# Altium PCB OBC Subsystem_AVR.PcbDoc
Units mil, origin at the board's own origin, x right, y up, seen from the top; angles counter-clockwise.
Board outline 3757.87 x 3555.12 mil, 4 copper layers (Top Layer, Ground, Power, Bottom Layer), stack 64.6 mil thick; 94 components, 88 nets, 413 pads, 0 vias.
Unrouted connection lines stored in the file: 208.
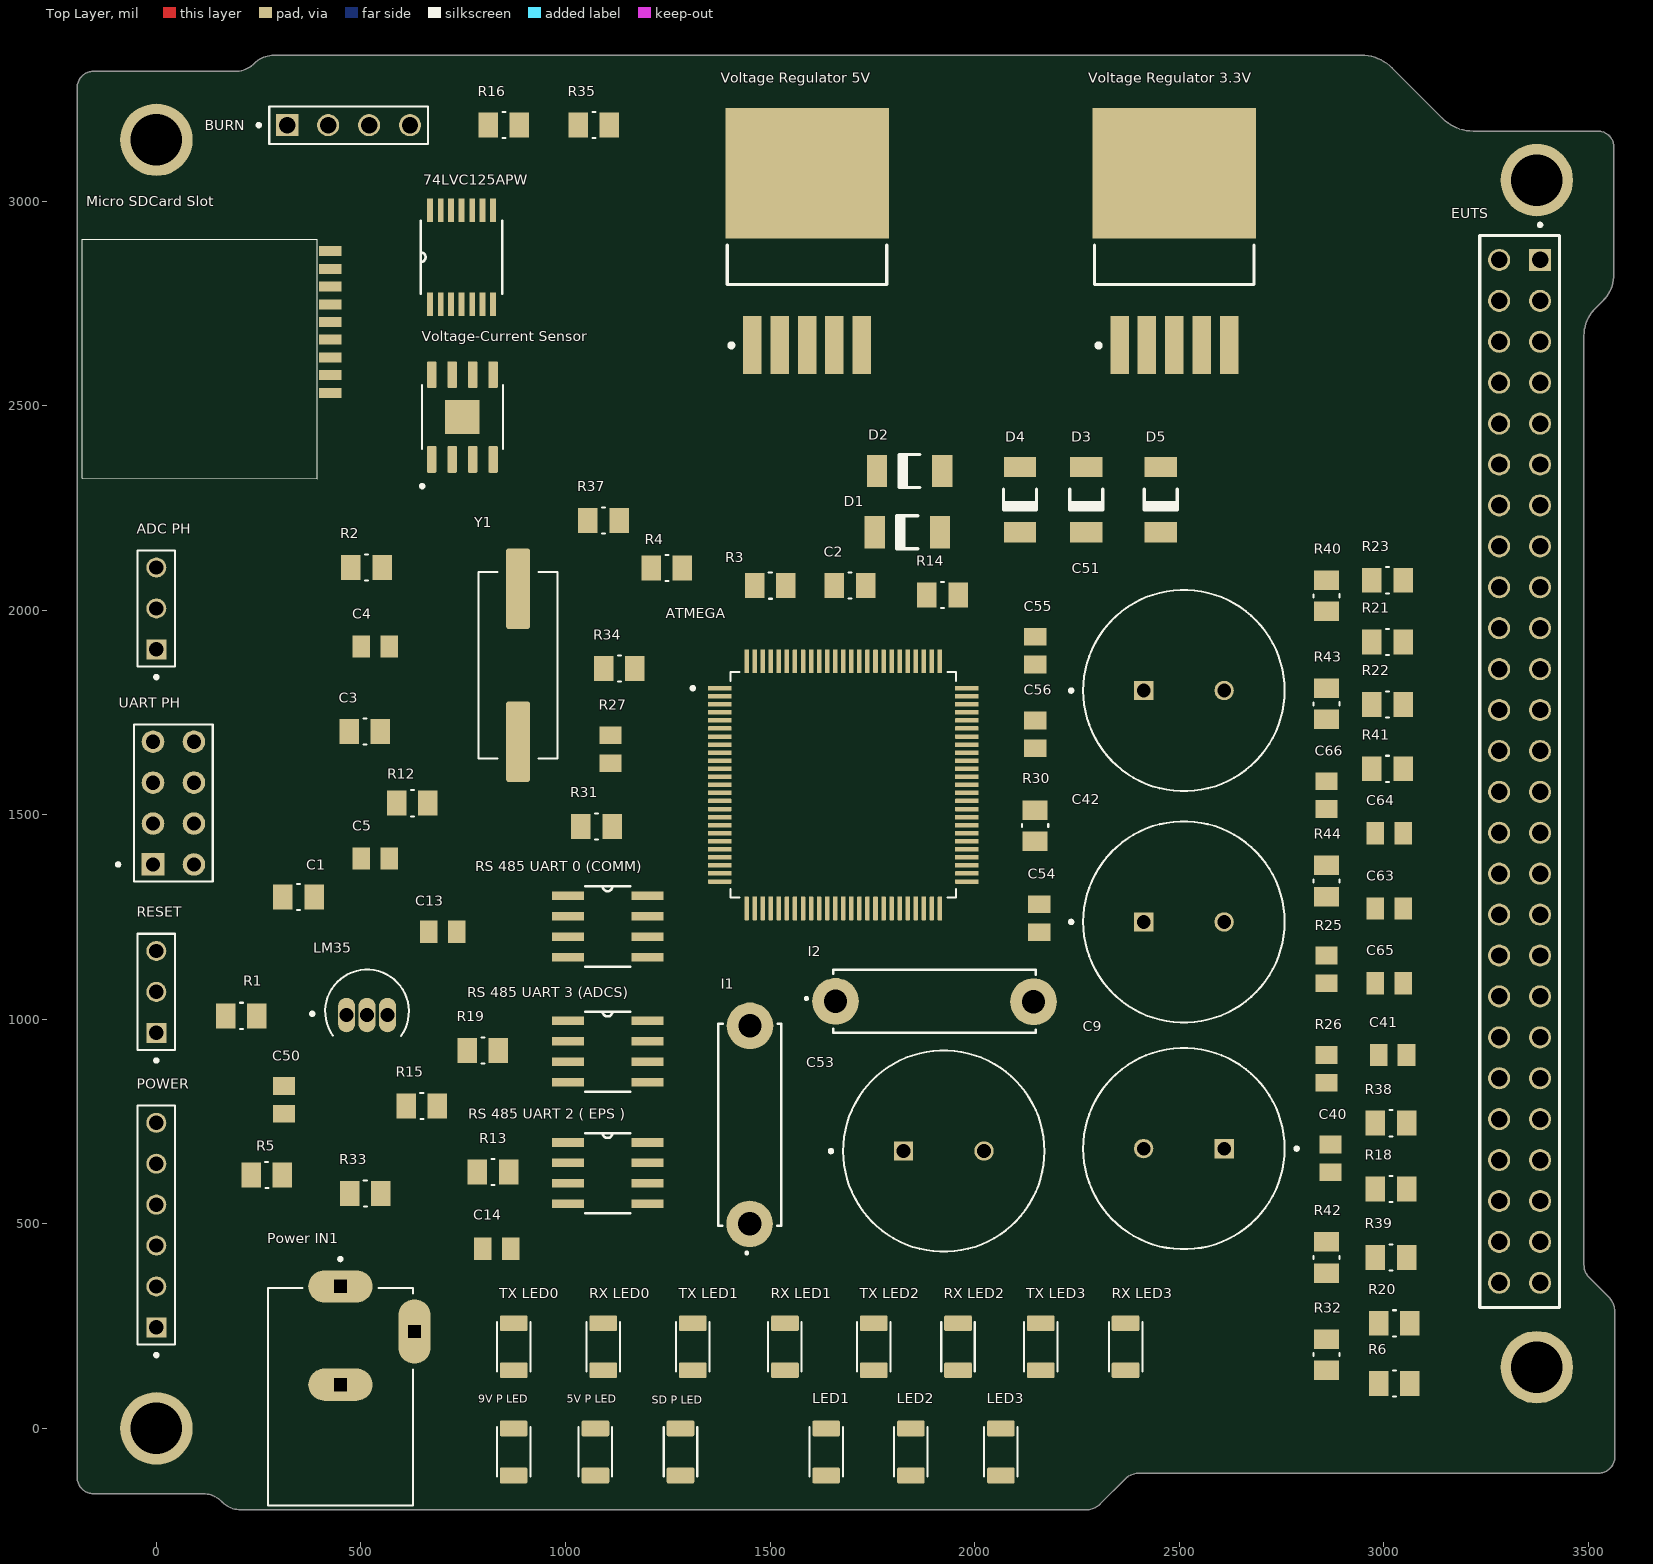
[diagram p0: Top Layer view]
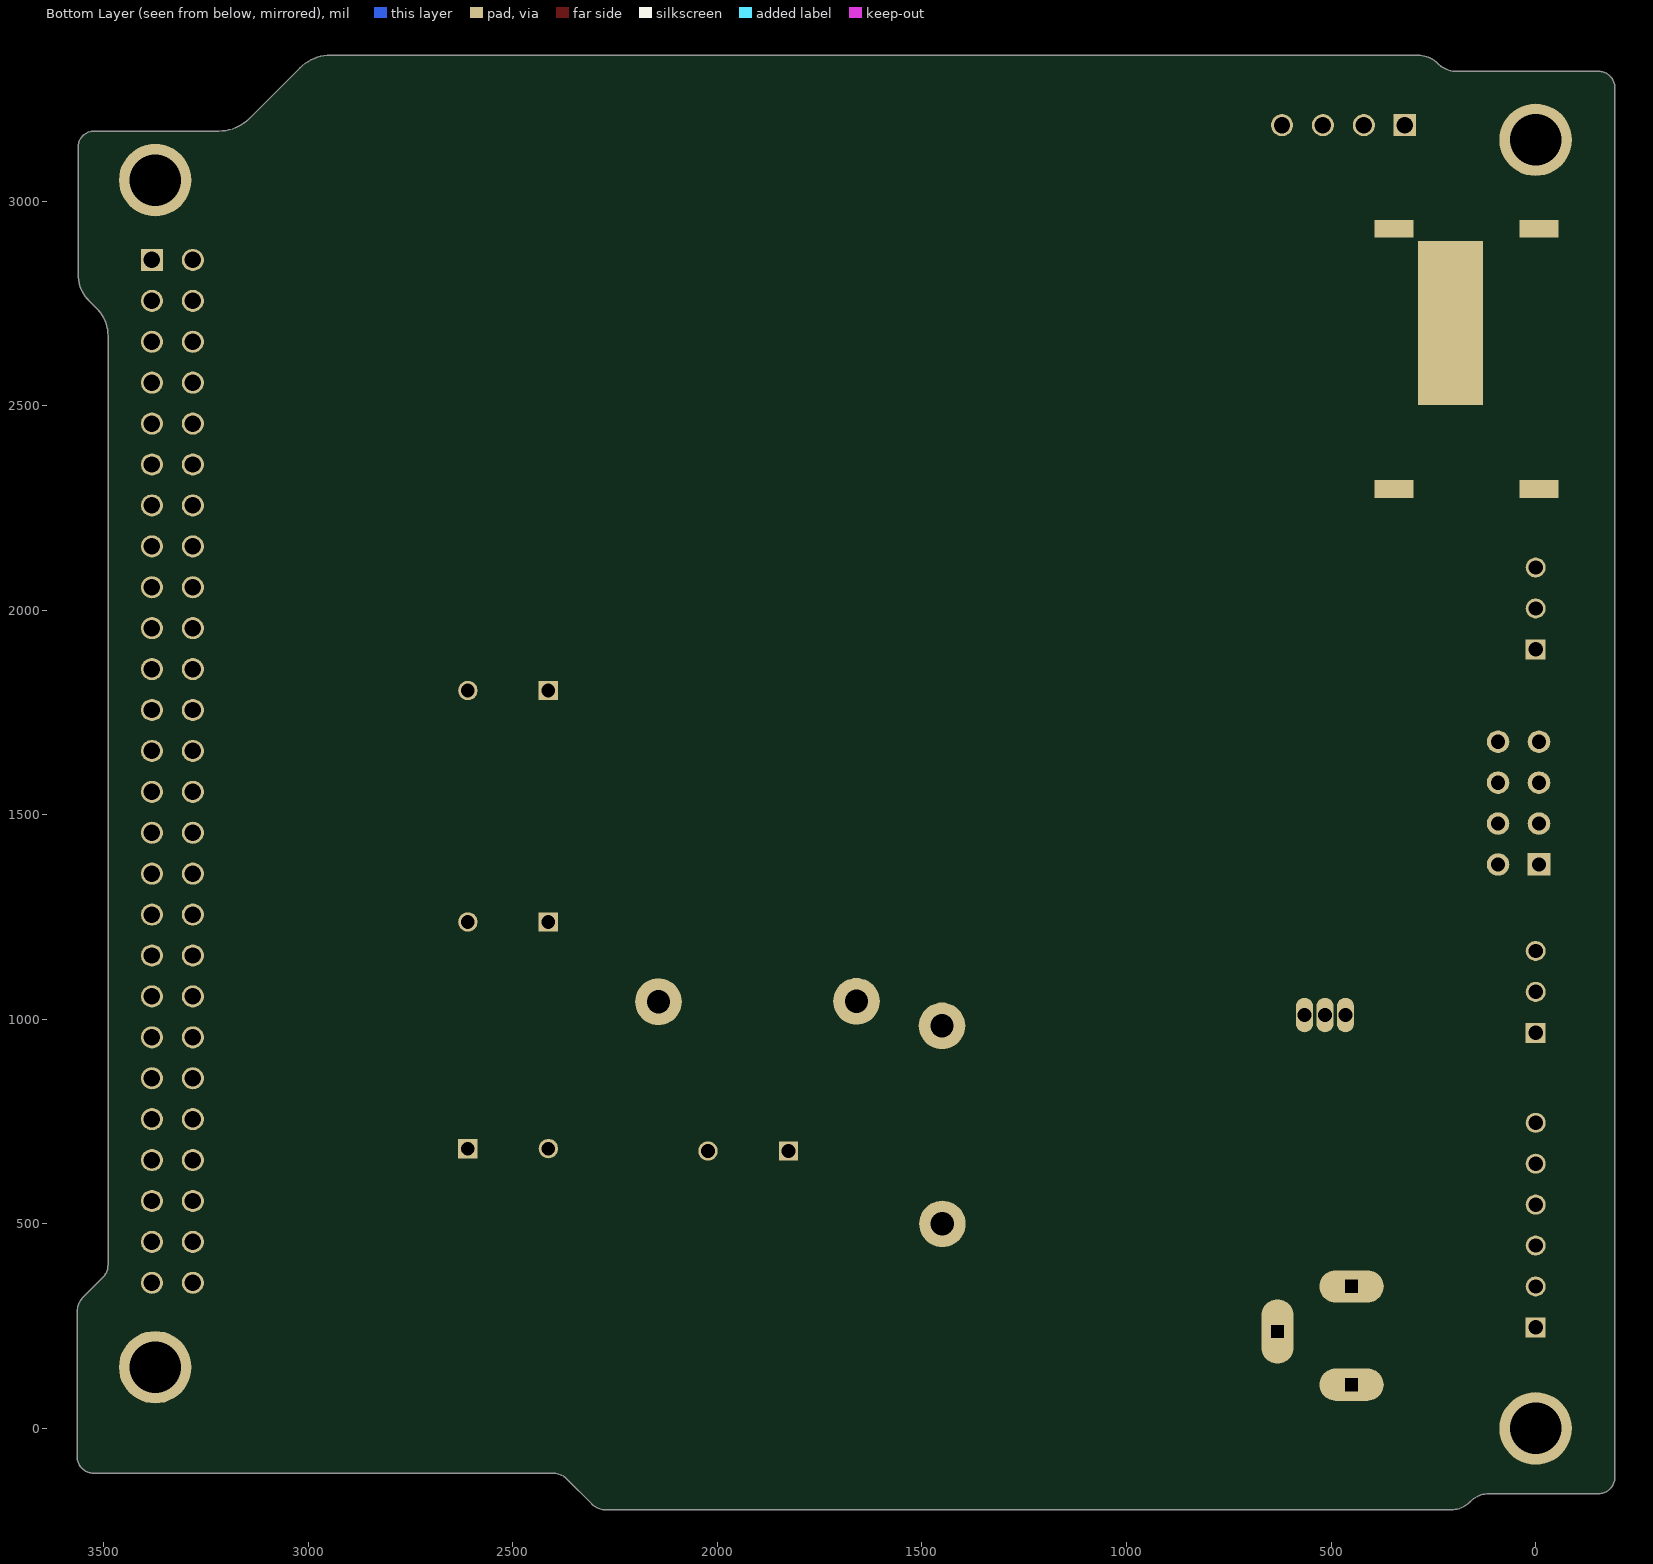
[diagram p1: Bottom Layer view, seen from below]
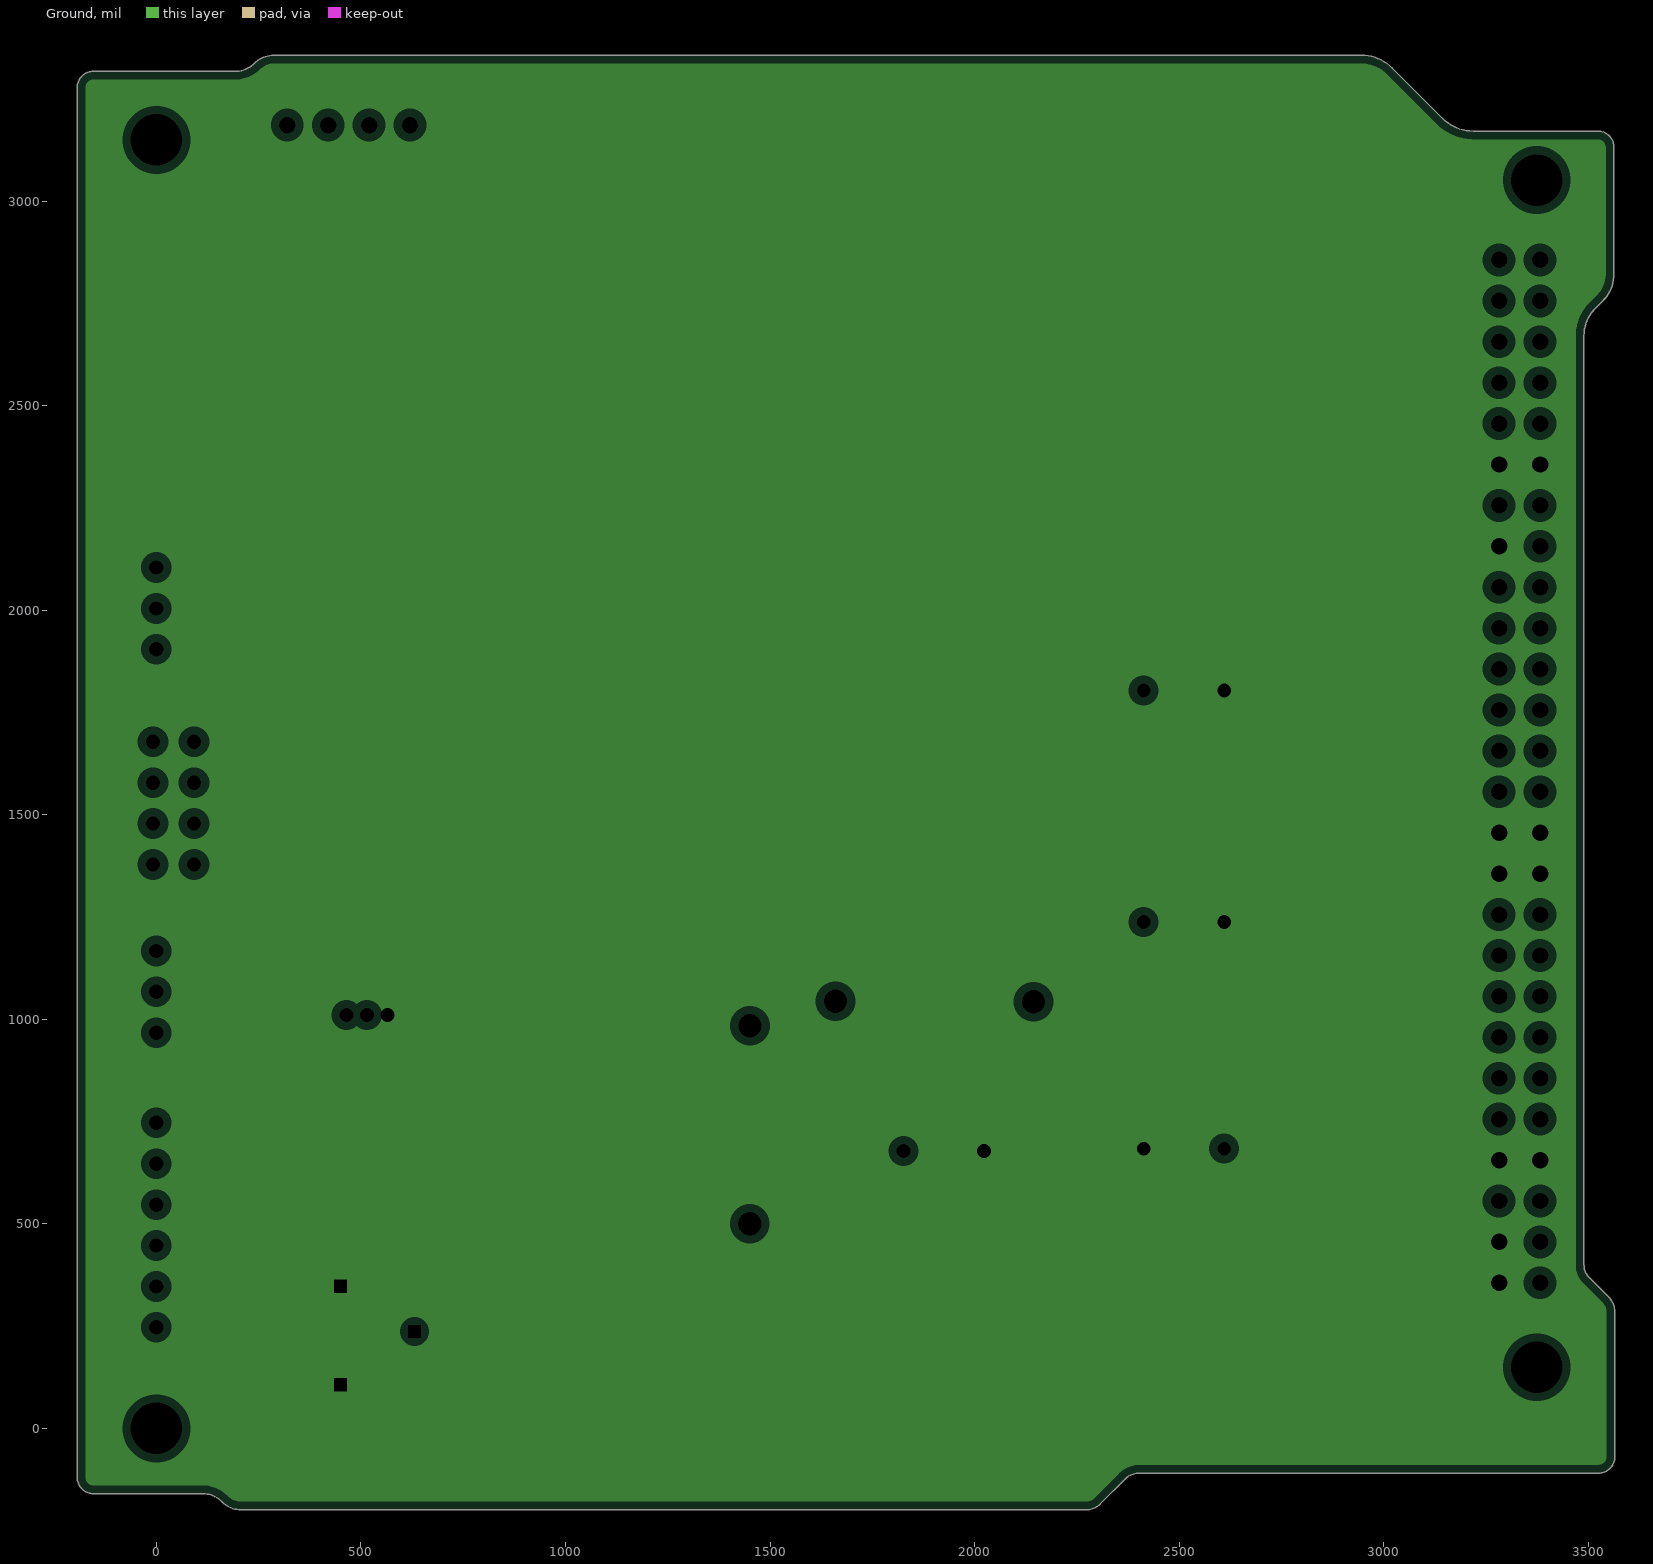
[diagram p2: Ground, clearances drawn from the general rule]
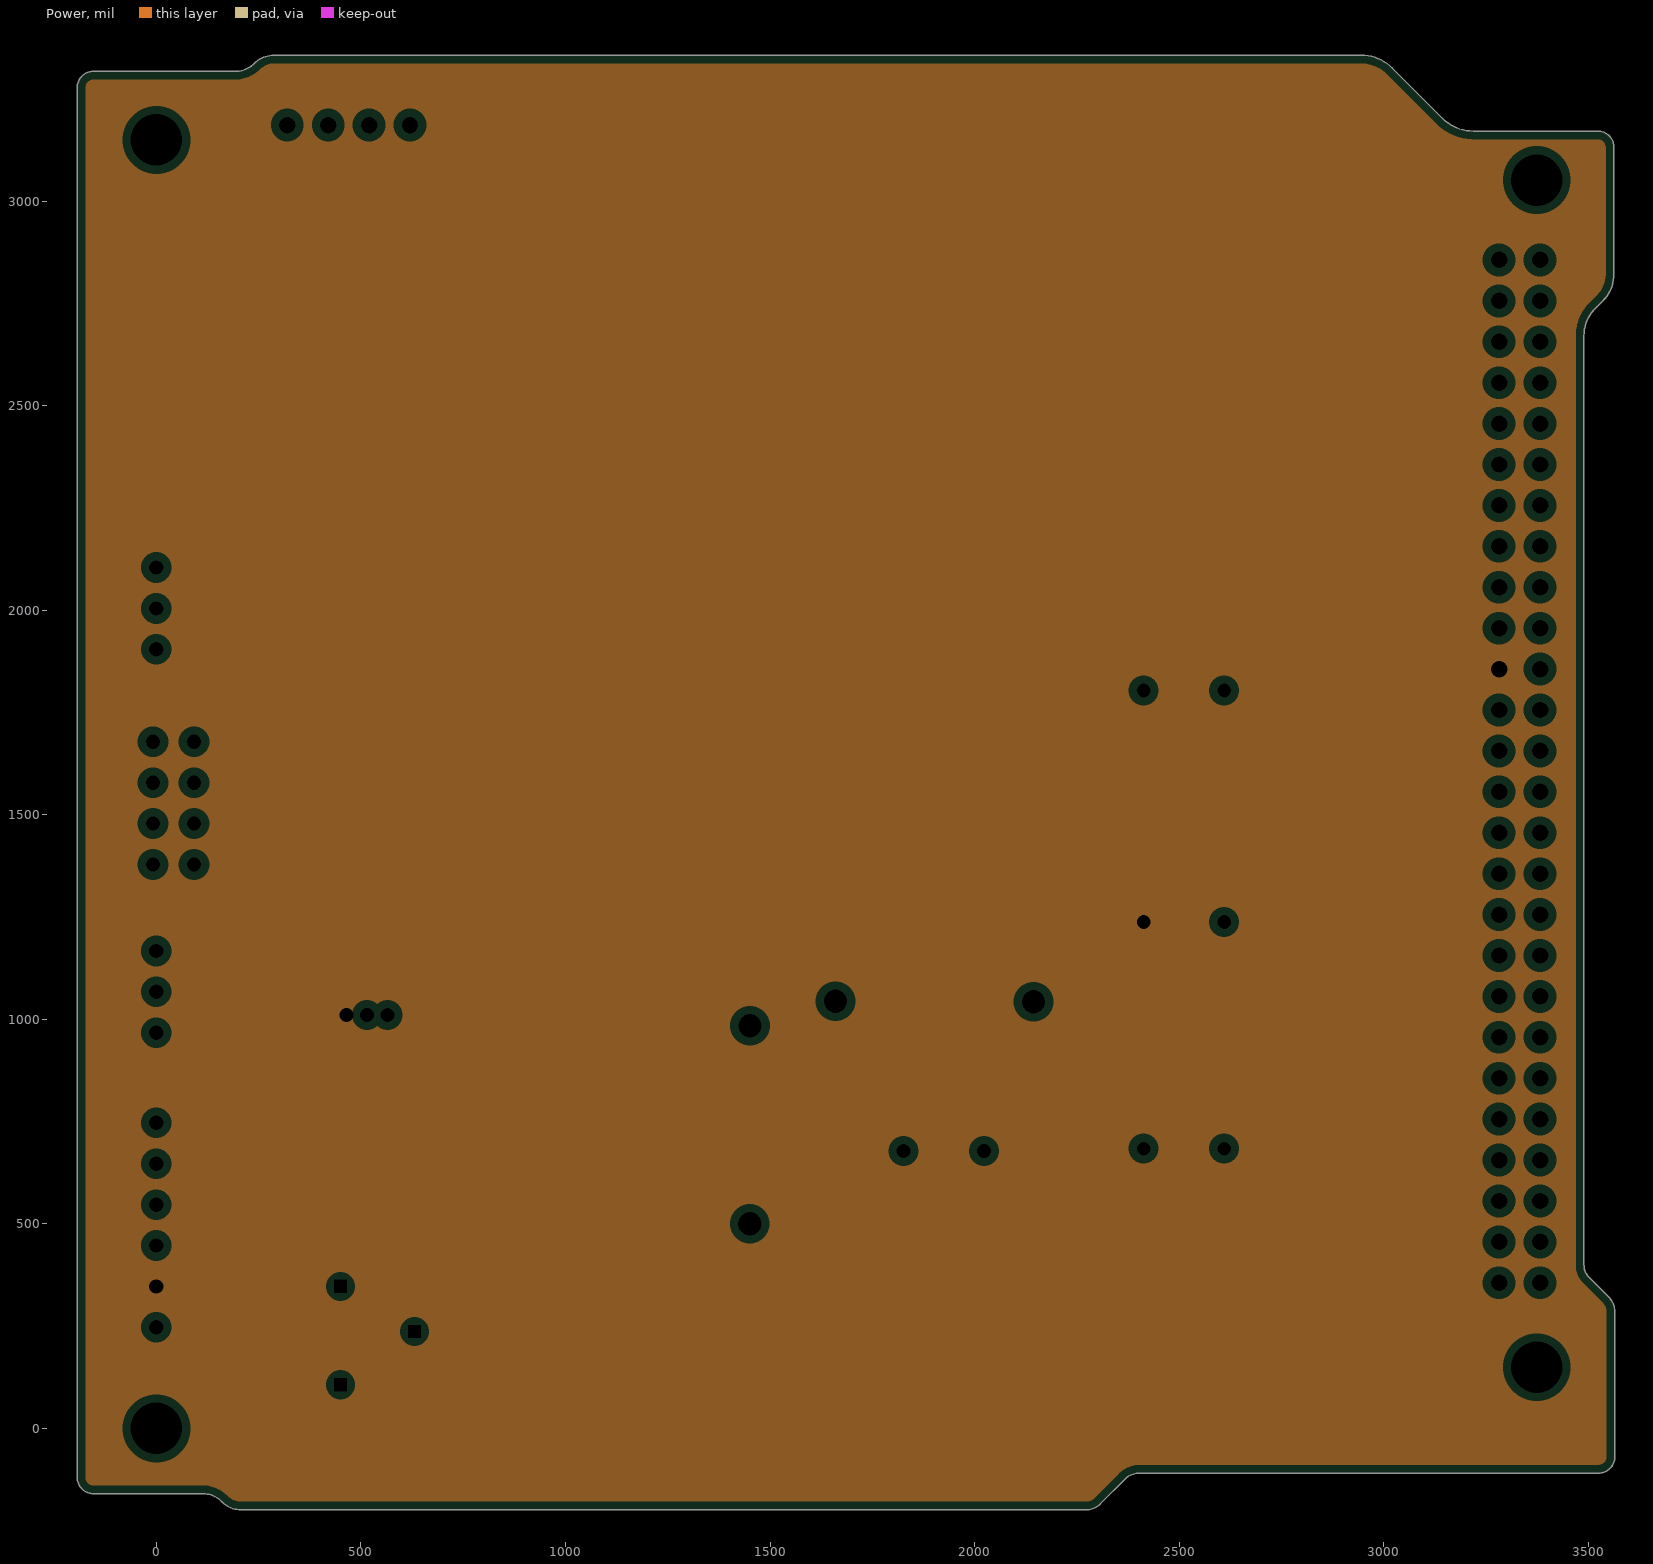
[diagram p3: Power, clearances drawn from the general rule]

## Layer stack, top to bottom
Top Solder: solder mask 0.4, Solder Resist, Dk 3.5
Top Layer: signal copper 1.4
Dielectric 1: prepreg 6.7, FR-4, Dk 4.35
Ground: plane copper 0.7, net G
Dielectric 3: core 47, FR-4, Dk 4.35
Power: plane copper 0.7, net VCC-5V(OBC)
Dielectric 2: prepreg 6.7, FR-4, Dk 4.35
Bottom Layer: signal copper 1.4
Bottom Solder: solder mask 0.4, Solder Resist, Dk 3.5

## Board outline
114.17,-159.45 cw(c114.17,-223.13) 159.2,-178.1 161.27,-180.17 ccw(c206.3,-135.14) 206.3,-198.82 2272.83,-198.82 ccw(c2272.83,-150.82) 2306.78,-184.76 2368.42,-123.11 cw(c2402.36,-157.05) 2402.36,-109.06 3525.2,-109.06 ccw(c3525.2,-69.68) 3564.57,-69.68 3564.57,285.43 ccw(c3513.72,285.43) 3549.67,321.39 3528.54,342.52 3502.04,369.03 cw(c3532.62,399.61) 3489.37,399.61 3489.37,2671.26 cw(c3582.52,2671.26) 3516.65,2737.12 3535.32,2755.79 ccw(c3469.45,2821.65) 3562.6,2821.65 3562.6,3131.5 ccw(c3523.23,3131.5) 3523.23,3170.87 3218.5,3170.87 cw(c3218.5,3276.37) 3143.9,3201.77 3020.27,3325.4 ccw(c2945.67,3250.8) 2945.67,3356.3 287.48,3356.3 ccw(c287.48,3289.09) 239.96,3336.61 cw(c192.44,3384.14) 192.44,3316.93 -153.94,3316.93 ccw(c-153.94,3277.56) -193.31,3277.56 -193.31,-120.08 ccw(c-153.94,-120.08) -153.94,-159.45

## Design rules (kind name [scope] priority, off if disabled: settings)
Clearance [All] p1: gap=7 ignorepadtopadclearanceinfootprint=FALSE except(0: Arc-Hole Track-Hole SMDPad-Hole THPad-Hole Via-Hole Fill-Hole Poly-Hole Region-Hole Text-Hole)
ComponentClearance [All] p1: gap=30 collisioncheckmode=3 verticalgap=30 showdistances=FALSE
DiffPairsRouting [All] p1: maxlimit=10 minlimit=10 mostfreqgap=10 toplayer_minwidth=15 toplayer_maxwidth=15 toplayer_prefwidth=15 bottomlayer_minwidth=15 bottomlayer_maxwidth=15 bottomlayer_prefwidth=15 substack1={0761D619-B0FF-4D42-81BD-1B94FE1A46B2} toplayer_{0761d619-b0ff-4d42-81bd-1b94fe1a46b2}_minwidth=15 toplayer_{0761d619-b0ff-4d42-81bd-1b94fe1a46b2}_maxwidth=15 toplayer_{0761d619-b0ff-4d42-81bd-1b94fe1a46b2}_prefwidth=15 bottomlayer_{0761d619-b0ff-4d42-81bd-1b94fe1a46b2}_minwidth=15 bottomlayer_{0761d619-b0ff-4d42-81bd-1b94fe1a46b2}_maxwidth=15 bottomlayer_{0761d619-b0ff-4d42-81bd-1b94fe1a46b2}_prefwidth=15 maxuncoupledlength=500
HoleSize [All] p1: absolutevalues=TRUE maxlimit=130 minlimit=1 maxpercent=80.000 minpercent=20.000
HoleToHoleClearance [All] p1: gap=6 allowstackedmicrovias=TRUE
MinimumSolderMaskSliver [All] p1: minsoldermaskwidth=3
PlaneClearance [All] p1: clearance=20
PlaneConnect [All] p1: planeconnectstyle=Relief reliefexpansion=20 reliefentries=4 reliefconductorwidth=10 reliefairgap=10
PolygonConnect [All] p1: connectstyle=Relief reliefconductorwidth=10 reliefentries=4 polygonreliefangle="90 Angle" airgapwidth=10
RoutingVias [All] p1: holewidth=12 width=24 viastyle="Through Hole" minholewidth=10 minwidth=10 maxholewidth=12 maxwidth=24
SilkToSilkClearance [All] p1: silktosilkclearance=4
SilkToSolderMaskClearance [IsPad] p1: minsilkscreentomaskgap=4 clearancetoexposedcopper=TRUE
SolderMaskExpansion [All] p1: expansion=3 istentingtop=FALSE
Width [All] p1: maxlimit=40 minlimit=10 preferedwidth=12 substack1={0761D619-B0FF-4D42-81BD-1B94FE1A46B2} toplayer_{0761d619-b0ff-4d42-81bd-1b94fe1a46b2}_minwidth=7 bottomlayer_{0761d619-b0ff-4d42-81bd-1b94fe1a46b2}_minwidth=7 minimp=50.000000 maximp=50.000000 favimp=50.000000
21 further rules are at their usual default settings.

## Components (designator, comment, footprint, x,y, rotation, side; value= is the part's Value field where it differs from the comment)
"5V P LED" "BLUE-LED" RESC3015X65-01 1073,-56.75 r90 top
"9V P LED" "WHITE-LED" RESC3015X65-01 873.11,-56.75 r90 top
74LVC125APW "74LVC125APW_118_ic in microSD module" SOP65P640X110-14N 746,2862.67 r90 top
"ADC PH" "3 Position PinHeader 1Row" TE_3-103327-3 0,1904.13 r90 top
ATMEGA "" QFP50P1600X1600X120-100N 1679,1573 r0 top (schematic designator Atmega)
BURN "4 Position PinHeader 1Row" TE_3-644456-4 320,3185.46 r0 top
C1 "(1206) 22pF" CAPC3216X125N0 348,1297 r180 top
C2 "(1206) 22pF" CAPC3216X125N0 1696,2058 r180 top
C3 "(1206) 22pF" CAPC3216X125N0 509,1705 r0 top
C4 "(0805) 100nF" CAPC2012X95N-0 534.98,1911 r0 top
C5 "(0805) 100nf" CAPC2012X95N-0 535,1393 r0 top
C9 "220uF" CAPPRD500W60D1250H2500 2511.43,684 r180 top
C13 "(0805) 100nf" CAPC2012X95N-0 700,1214 r0 top
C14 "(0805) 100nf" CAPC2012X95N-0 832,439 r0 top
C40 "(0805) 1uF" CAPC2012X95N-0 2870,660 r90 top
C41 "(0805) 1uF" CAPC2012X95N-0 3021.61,913 r0 top
C42 "220uF" CAPPRD500W60D1250H2500 2511.43,1238 r0 top
C50 "(0805) 1uF" CAPC2012X95N-0 312,803 r90 top
C51 "330uF" CAPPRD500W60D1250H2500 2511.43,1803.54 r0 top
C53 "330uF" CAPPRD500W60D1250H2500 1924.57,678 r0 top
C54 "(0805) 1uF" CAPC2012X95N-0 2158,1247 r90 top
C55 "(0805) 1uF" CAPC2012X95N-0 2148,1901 r90 top
C56 "(0805) 1uF" CAPC2012X95N-0 2148,1696.5 r90 top
C63 "(0805) 100nF" CAPC2012X95N-0 3013.31,1271 r0 top
C64 "(0805) 100nF" CAPC2012X95N-0 3013.31,1454.89 r0 top
C65 "(0805) 100nF" CAPC2012X95N-0 3013.31,1088.03 r0 top
C66 "(0805) 100nF" CAPC2012X95N-0 2860,1547.92 r90 top
D1 "" Diode_4148 1835.5,2190.55 r0 top
D2 "" Diode_4148 1841,2340 r0 top
D3 "" Diode_4148 2273,2270.28 r90 top
D4 "" Diode_4148 2111,2270.28 r90 top
D5 "" Diode_4148 2455,2270.28 r90 top
EUTS "52 Position Elevated Socket Connector" SAMTEC_ESQ-126-39-G-D 3382.01,2855.98 r90 top locked
I1 "47uH" IND -405,701.2 r90 top
I2 "47uH" IND 1861.2,2899 r0 top
LED1 "(1206) Yellow" RESC3015X65-01 1637,-56.75 r90 top
LED2 "(1206) Green" RESC3015X65-01 1844,-56.75 r90 top
LED3 "(1206) Green" RESC3015X65-01 2064,-56.75 r90 top
LM35 "Temperature Sensor" TO92127P521H735-4 515,1041 r0 top
"Micro SDCard Slot" "Micro-SD-Card-Module" SD-Card-Module 424.93,2531.13 r270 top
POWER "6 Position PinHeader 1Row" TE_6-146285-6 0,247.01 r90 top locked
"Power IN1" "Power Socket" GRAVITECH_CON-SOCJ-2155 450,107 r90 top
R1 "(1206) 10K" CAPC3216X125N0 207,1010.49 r0 top
R2 "(1206) 510K" CAPC3216X125N0 513,2106 r0 top
R3 "(1206) 510K" CAPC3216X125N0 1499.87,2061.74 r0 top
R4 "(1206) 10K" CAPC3216X125N0 1247,2105 r0 top
R5 "(1206) 120" CAPC3216X125N0 269,621 r0 top
R6 "(1206) 10K" CAPC3216X125N0 3025.05,112 r0 top
R12 "(1206) 120" CAPC3216X125N0 625,1530 r0 top
R13 "(1206) 120" CAPC3216X125N0 822,629 r0 top
R14 "(1206) 330" CAPC3216X125N0 1920.83,2039 r0 top
R15 "(1206) 10K" CAPC3216X125N0 648,790 r0 top
R16 "(1206) 3.3K" CAPC3216X125N0 848.69,3187.33 r0 top
R18 "(1206) 5.6K" CAPC3216X125N0 3016.75,587 r0 top
R19 "(1206) 10K" CAPC3216X125N0 797.41,925.87 r0 top
R20 "(1206) 3.3K" CAPC3216X125N0 3025.05,259 r0 top
R21 "(1206) 3.3K" CAPC3216X125N0 3008.45,1924 r0 top
R22 "(1206) 3.3K" CAPC3216X125N0 3008.45,1771.72 r0 top
R23 "(1206) 3.3K" CAPC3216X125N0 3008.45,2075 r0 top
R25 "(0805) 100K" CAPC2012X95N-0 2860,1122.01 r90 top
R26 "(0805) 1K" CAPC2012X95N-0 2860,879.02 r90 top
R27 "(0805) 1K" CAPC2012X95N-0 1110,1660 r90 top
R30 "(1206) 150" CAPC3216X125N0 2146.13,1472.61 r90 top
R31 "(1206) 85" CAPC3216X125N0 1075,1473 r0 top
R32 "(1206) 150" CAPC3216X125N0 2858.13,179.58 r90 top
R33 "(1206) 300" CAPC3216X125N0 510,576 r0 top
R34 "(1206) 85" CAPC3216X125N0 1131,1859 r0 top
R35 "(1206) 65" CAPC3216X125N0 1068.69,3187.33 r0 top
R37 "(1206) 150" CAPC3216X125N0 1092,2221 r0 top
R38 "(1206) 150" CAPC3216X125N0 3016.75,747.87 r0 top
R39 "(1206) 150" CAPC3216X125N0 3016.75,420 r0 top
R40 "(1206) 85" CAPC3216X125N0 2858.13,2034.29 r90 top
R41 "(1206) 150" CAPC3216X125N0 3008.45,1614.24 r0 top
R42 "(1206) 85" CAPC3216X125N0 2858.13,417.14 r90 top
R43 "(1206) 150" CAPC3216X125N0 2858.13,1770.38 r90 top
R44 "(1206) 85" CAPC3216X125N0 2858.13,1337.31 r90 top
RESET "3 Position PinHeader 1Row" TE_3-103327-3 0,967 r90 top
"RS 485 UART 0 (COMM)" "" SOIC127P600X175-8N0 1103,1227 r0 top
"RS 485 UART 2 ( EPS )" "" SOIC127P600X175-8N0 1103,624 r0 top
"RS 485 UART 3 (ADCS)" "" SOIC127P600X175-8N0 1103,921 r0 top
"RX LED0" "(1206) Blue" RESC3015X65-01 1092.25,200.38 r90 top
"RX LED1" "(1206) Blue" RESC3015X65-01 1536.25,200.38 r90 top
"RX LED2" "(1206) Blue" RESC3015X65-01 1959.25,200.38 r90 top
"RX LED3" "(1206) Blue" RESC3015X65-01 2368.83,200.38 r90 top
"SD P LED" "RED-LED" RESC3015X65-01 1281,-56.75 r90 top
"TX LED0" "(1206) Green" RESC3015X65-01 873.11,200.38 r90 top
"TX LED1" "(1206) Green" RESC3015X65-01 1311.25,200.38 r90 top
"TX LED2" "(1206) Green" RESC3015X65-01 1753.25,200.38 r90 top
"TX LED3" "(1206) Green" RESC3015X65-01 2161.25,200.38 r90 top
"UART PH" "8 Position PinHeader 2Row" TE_8-146256-8 41.86,1528.45 r90 top
"Voltage Regulator 3.3V" "Voltage Regulator" TO-263-5 2488,2902 r90 top
"Voltage Regulator 5V" "Voltage Regulator" TO-263-5 1590.38,2902 r90 top
"Voltage-Current Sensor" "MAX471 IC" SOIC127P600X168-8N 748,2472 r90 top
Y1 "16MHz" XTAL1140X490X430N-0 885.69,1865.75 r90 top

## Footprints (in the part's own frame and the unit in brackets; to place one, negate y for a bottom-side part, rotate by r counter-clockwise, add the part's x,y. Pads: shape width x height; smd on the part's side, far side on the other; paste and mask are expansions set on the pad)
CAPC2012X95N-0 [mm]
  rect 1.1x1.38 smd: 1(-0.863,0) 2(0.863,0)
  body extent -1.6,-0.8 1.6,0.8, height 1.2
CAPC3216X125N0 [mm]
  rect 1.21x1.55 smd: 1(-0.95,-0.047) 2(0.987,-0.047)
  silkscreen extent -0.08,-0.86 0.12,0.76, body extent -1.58,-0.84 1.62,0.76, height 1.25
CAPPRD500W60D1250H2500 [mm]
  round 1.2 hole 0.85: N(2.5,0)
  rect 1.2x1.2 hole 0.85: P(-2.5,0)
  silkscreen extent -7.1,-6.25 6.25,6.25, body extent -6.25,-6.25 6.25,6.25, height 25
Diode_4148 [mm] "MELF Diode, 2-Leads, Body 5.05x2.00mm, IPC Medium Density"
  rect 1.25x2 smd: 1(-2.025,0) 2(2.025,0)
  silkscreen extent -0.65,-1.03 0.65,1.03, body extent -2.6,-1.05 2.6,1.05, height 2.1
GRAVITECH_CON-SOCJ-2155 [mm]
  oval 2x4 hole 0.8 square: 1(6.1,0) 3(0,0)
  oval 4x2 hole 0.8 square: 2(3.3,-4.6)
  silkscreen extent -7.5,-4.5 7.9,4.5, body extent -7.56,-4.57 6.54,4.68, height 11.1
IND [mil]
  round 114 hole 57: 1(-201.2,-1855) 2(282.8,-1856)
  silkscreen extent -275,-1932 288,-1778, body extent -172,-1912 253,-1794, height 118
QFP50P1600X1600X120-100N [mm]
  rrect25% 1.47x0.28 smd: 1(-7.67,6) 2(-7.67,5.5) 3(-7.67,5) 4(-7.67,4.5) 5(-7.67,4) 6(-7.67,3.5) 7(-7.67,3) 8(-7.67,2.5) 9(-7.67,2) 10(-7.67,1.5) 11(-7.67,1) 12(-7.67,0.5) 13(-7.67,0) 14(-7.67,-0.5) 15(-7.67,-1) 16(-7.67,-1.5) 17(-7.67,-2) 18(-7.67,-2.5) 19(-7.67,-3) 20(-7.67,-3.5) 21(-7.67,-4) 22(-7.67,-4.5) 23(-7.67,-5) 24(-7.67,-5.5) 25(-7.67,-6) 51(7.67,-6) 52(7.67,-5.5) 53(7.67,-5) 54(7.67,-4.5) 55(7.67,-4) 56(7.67,-3.5) 57(7.67,-3) 58(7.67,-2.5) 59(7.67,-2) 60(7.67,-1.5) 61(7.67,-1) 62(7.67,-0.5) 63(7.67,0) 64(7.67,0.5) 65(7.67,1) 66(7.67,1.5) 67(7.67,2) 68(7.67,2.5) 69(7.67,3) 70(7.67,3.5) 71(7.67,4) 72(7.67,4.5) 73(7.67,5) 74(7.67,5.5) 75(7.67,6)
  rrect25% 0.28x1.47 smd: 26(-6,-7.67) 27(-5.5,-7.67) 28(-5,-7.67) 29(-4.5,-7.67) 30(-4,-7.67) 31(-3.5,-7.67) 32(-3,-7.67) 33(-2.5,-7.67) 34(-2,-7.67) 35(-1.5,-7.67) 36(-1,-7.67) 37(-0.5,-7.67) 38(0,-7.67) 39(0.5,-7.67) 40(1,-7.67) 41(1.5,-7.67) 42(2,-7.67) 43(2.5,-7.67) 44(3,-7.67) 45(3.5,-7.67) 46(4,-7.67) 47(4.5,-7.67) 48(5,-7.67) 49(5.5,-7.67) 50(6,-7.67) 76(6,7.67) 77(5.5,7.67) 78(5,7.67) 79(4.5,7.67) 80(4,7.67) 81(3.5,7.67) 82(3,7.67) 83(2.5,7.67) 84(2,7.67) 85(1.5,7.67) 86(1,7.67) 87(0.5,7.67) 88(0,7.67) 89(-0.5,7.67) 90(-1,7.67) 91(-1.5,7.67) 92(-2,7.67) 93(-2.5,7.67) 94(-3,7.67) 95(-3.5,7.67) 96(-4,7.67) 97(-4.5,7.67) 98(-5,7.67) 99(-5.5,7.67) 100(-6,7.67)
  silkscreen extent -9.44,-7 7,7, body extent -8,-8 8,8, height 1.12
RESC3015X65-01 [mm]
  rrect20% 0.98x1.72 smd: 1(-1.479,-0.004) 2(1.441,-0.004)
  silkscreen extent -1.54,-1.04 1.52,1.04, body extent -1.63,-0.8 1.57,0.8, height 1.1
SAMTEC_ESQ-126-39-G-D [mm]
  rect 1.37x1.37 hole 1.02: 01(0,0)
  round 1.37 hole 1.02: 02(0,2.54) 03(-2.54,0) 04(-2.54,2.54) 05(-5.08,0) 06(-5.08,2.54) 07(-7.62,0) 08(-7.62,2.54) 09(-10.16,0) 10(-10.16,2.54) 11(-12.7,0) 12(-12.7,2.54) 13(-15.24,0) 14(-15.24,2.54) 15(-17.78,0) 16(-17.78,2.54) 17(-20.32,0) 18(-20.32,2.54) 19(-22.86,0) 20(-22.86,2.54) 21(-25.4,0) 22(-25.4,2.54) 23(-27.94,0) 24(-27.94,2.54) 25(-30.48,0) 26(-30.48,2.54) 27(-33.02,0) 28(-33.02,2.54) 29(-35.56,0) 30(-35.56,2.54) 31(-38.1,0) 32(-38.1,2.54) 33(-40.64,0) 34(-40.64,2.54) 35(-43.18,0) 36(-43.18,2.54) 37(-45.72,0) 38(-45.72,2.54) 39(-48.26,0) 40(-48.26,2.54) 41(-50.8,0) 42(-50.8,2.54) 43(-53.34,0) 44(-53.34,2.54) 45(-55.88,0) 46(-55.88,2.54) 47(-58.42,0) 48(-58.42,2.54) 49(-60.96,0) 50(-60.96,2.54) 51(-63.5,0) 52(-63.5,2.54)
  silkscreen extent -65.02,-1.2 2.27,3.75, body extent -65.15,-1.27 1.4,3.81, height 8.51
SD-Card-Module [mm]
  rect 0.62x1.4 smd: 1(0,0) 2(-1.1,0) 3(-2.2,0) 4(-3.3,0) 5(-4.4,0) 6(-5.5,0) 7(-6.6,0) 8(-7.7,0) 9(-8.8,0)
  rect 1.1x2.4 smd far side: GND(-10.19,-2) GND(-10.18,-11) GND(5.97,-2) GND(5.97,-11)
  rect 10.2x4.05 smd far side: GND(-4.34,-5.51)
  silkscreen extent -9.55,-15.4 5.32,-0.8, body extent -9.06,-15.37 4.74,0.13, height 1.95
SOIC127P600X168-8N [mm]
  rrect25% 1.66x0.59 smd: 1(-2.63,1.905) 2(-2.63,0.635) 3(-2.63,-0.635) 4(-2.63,-1.905) 5(2.63,-1.905) 6(2.63,-0.635) 7(2.63,0.635) 8(2.63,1.905)
  rect 2.135x2.135 smd paste-2: 9(0,0)
  silkscreen extent -4.39,-2.52 1.99,2.59, body extent -3,-2.45 3,2.45, height 1.75
SOIC127P600X175-8N0 [mil]
  rect 78x21 smd: 1(-97,75) 2(-97,25) 3(-97,-25) 4(-97,-75) 5(97,-75) 6(97,-25) 7(97,25) 8(97,75)
  silkscreen extent -55,-98 55,98, body extent -124,-97 113,95, height 67
SOP65P640X110-14N [mil]
  rect 58x14 smd: 1(-115,77) 2(-115,51) 3(-115,26) 4(-115,0) 5(-115,-26) 6(-115,-51) 7(-115,-77) 8(115,-77) 9(115,-51) 10(115,-26) 11(115,0) 12(115,26) 13(115,51) 14(115,77)
  silkscreen extent -89,-100 89,100, body extent -126,-98 126,98, height 43
TE_3-103327-3 [mm]
  rect 1.24x1.24 hole 0.89: 1(0,0)
  round 1.24 hole 0.89: 2(2.54,0) 3(5.08,0)
  silkscreen extent -1.82,-1.17 6.15,1.17, body extent -1.31,-1.2 6.31,1.21, height 8.18
TE_3-644456-4 [mm]
  rect 1.37x1.37 hole 1.02: 1(0,0)
  round 1.37 hole 1.02: 2(2.54,0) 3(5.08,0) 4(7.62,0)
  silkscreen extent -1.87,-1.17 8.74,1.17, body extent -1.14,-1.14 8.72,1.19, height 10.03
TE_6-146285-6 [mm]
  rect 1.24x1.24 hole 0.89: 1(0,0)
  round 1.24 hole 0.89: 2(2.54,0) 3(5.08,0) 4(7.62,0) 5(10.16,0) 6(12.7,0)
  silkscreen extent -1.82,-1.17 13.77,1.17, body extent -1.07,-1.14 13.77,1.14, height 8.1
TE_8-146256-8 [mm]
  rect 1.398x1.398 hole 0.89: 1(-3.81,1.27)
  round 1.398 hole 0.89: 2(-1.27,1.27) 3(1.27,1.27) 4(3.81,1.27) 5(-3.81,-1.27) 6(-1.27,-1.27) 7(1.27,-1.27) 8(3.81,-1.27)
  silkscreen extent -4.88,-2.44 4.88,3.54, body extent -5.08,-2.57 5.08,2.51, height 8.38
TO92127P521H735-4 [mm]
  oval 1.07x2.14 hole 0.85: 1(-1.27,-0.775) 2(0,-0.775) 3(1.27,-0.775)
  silkscreen extent -3.5,-2.08 2.6,2.04, body extent -2.4,-2.29 2.39,1.64, height 5.69
TO-263-5 [mm] "D2-PAK, 6-Pads, Body 8,9x9,9mm (max), IPC Low Density"
  rect 3.6x1.15 smd: 1(-6.45,3.4) 2(-6.45,1.7) 3(-6.45,0) 4(-6.45,-1.7) 5(-6.45,-3.4)
  rect 8.1x10.15 smd paste-5: 6(4.2,0)
  silkscreen extent -6.6,-4.95 -0.25,4.95, body extent -7.31,-5.08 7.33,5.08, height 4.57
XTAL1140X490X430N-0 [mm]
  rrect25% 5.01x1.51 smd: 1(-4.757,0.04) 2(4.743,0.04)
  silkscreen extent -5.81,-2.41 5.79,2.49, body extent -6.62,-2.35 6.58,2.45, height 4.3

## Part data
"5V P LED" "9V P LED" LED1 LED2 LED3 "RX LED0" "RX LED1" "RX LED2" "RX LED3" "SD P LED" "TX LED0" "TX LED1" "TX LED2" "TX LED3": library part "LED 1206", "LED SMD 1206 High Quality Forward Voltage: 3.2 V / Brightness: 700 mcd", Emitting Color=Amber, Forward Voltage=2V, Manufacturer="Wurth Elektronik", Manufacturer Part Number=150060AS75003, Operating Temperature max.=100C, Operating Temperature min.=-40C, Chip Technology=AlInGaP, ComponentLink1Description="Manufacturer Link", ComponentLink1URL=http://www.we-online.de, ComponentLink2Description=Datasheet, ComponentLink2URL=https://www.we-online.com/catalog/datasheet/150060AS75003.pdf, Dominant Wavelength=605nm, Height=0.7mm, Length=1.6mm, Luminous Intensity=350mcd, Mounting Technology=SMT, Packaging="Tape and Reel", Peak Wavelength=610nm, Size=0603, Viewing Angle=140°, Width=0.8mm
"ADC PH" RESET: "Conn Unshrouded Header HDR 3 POS 2.54mm Solder ST Thru-Hole Carton", Package=None, Availability=Unavailable, EU_RoHS_Compliance=Compliant, MF="TE Connectivity", MP=4-103327-5, Price=None, SnapEDA_Link=https://www.snapeda.com/parts/4-103327-5/TE%20Connectivity%20AMP%20Connectors/view-part/2403997/?ref=snap, TE_purchase_URL=https://www.te.com/usa-en/product-4-103327-5.html?te_bu=Cor&te_type=disp&te_campaign=seda_glo_cor-seda-global-disp-prtnr-fy19-seda-model-bom-cta_sma-317_1&elqCampaignId=32493
ATMEGA: library part ATMEGA2560-16AU, Package=None, Availability=Unavailable, MP=ATMEGA2560-16AU, Price=None
BURN: "Conn Unshrouded Header HDR 4 POS 2.54mm Solder ST Thru-Hole Bag/Box", Package=None, Availability=Warning, Centerline_Pitch="2.54 mm[.1 in]", DigiKey-Purchase-URL=https://snapeda.com/shop?store=DigiKey&id=482664, EU_RoHS_Compliance=Compliant, MF="TE Connectivity", Mouser-Purchase-URL=https://snapeda.com/shop?store=Mouser&id=482664, MP=3-644456-4, Number_of_Positions=4, Price=None, Product_Type=Connector, SnapEDA_Link=https://www.snapeda.com/parts/3-644456-4/TE%20Connectivity%20AMP%20Connectors/view-part/482664/?ref=snap
C1 C2 C3: library part "Capacitor 1206", "UMF316B7103KFHT/1206 Capacitor", Package=None, Availability=Unavailable, MP=UMF316B7103KFHT, Price=None
C4 C5 C13 C14 C40 C41 C50 C54 C55 C56 C63 C64 C65 C66: library part "Capacitor 0805", "UMK212SD103KD-T/CAP CER 10000PF 50V 0805", Package=None, Availability=Unavailable, MP=UMK212SD103KD-T, Price=None
C9 C42 C51 C53: library part "Aluminum Electrolytic Capacitor", "Aluminum Electrolytic Capacitors - Radial Leaded 47uF 250volts AEC-Q200", Package="RADIAL-2 Panasonic", Availability="In Stock", Check_prices=https://www.snapeda.com/parts/EEUEB2E470B/Panasonic/view-part/?ref=eda, MF=Panasonic, MP=EEUEB2E470B, Price=None, SnapEDA_Link=https://www.snapeda.com/parts/EEUEB2E470B/Panasonic/view-part/?ref=snap
D1 D2 D3 D4 D5: library part "Diode 4148"
EUTS: "ESQ-126-39-G-D/52 Position Elevated Socket Connector Through Hole", Package=None, Availability=Unavailable, MF=Samtec, MP=ESQ-126-39-G-D, Price=None, SnapEDA_Link=https://www.snapeda.com/parts/ESQ-126-39-G-D/Samtec%20Inc./view-part/490181/?ref=snap
I1 I2: library part "Inductor DIP"
LM35: library part "LM35DZ/NOPB/Temperature Sensor", "LM35DZ/NOPB/Temperature Sensor Analog, Local 0Â°C ~ 100Â°C 10mV/Â°C TO-92-3", Package="E-PKG AXIAL-LEADED-2 ON Semiconductor", Availability="Not in stock", Check_prices=https://www.snapeda.com/parts/LM35DZ/Texas+Instruments/view-part/?ref=eda, MF="Texas Instruments", MP=LM35DZ, Price=None, SnapEDA_Link=https://www.snapeda.com/parts/LM35DZ/Texas+Instruments/view-part/?ref=snap
POWER: "Connector Header Through Hole 6 position 0.100 (2.54mm)", Package=None, Check_prices=https://www.snapeda.com/parts/5-146285-6/TE%20Connectivity%20AMP%20Connectors/view-part/2411669/?ref=eda, Digi-Key_Part_Number=A122872-ND, DigiKey-Purchase-URL=https://snapeda.com/shop?store=DigiKey&id=2411669, EU_RoHS_Compliance=Compliant, MF="TE Connectivity", MP=5-146285-6, SnapEDA_Link=https://www.snapeda.com/parts/5-146285-6/TE%20Connectivity%20AMP%20Connectors/view-part/2411669/?ref=snap
"Power IN1": "CON-SOCJ-2155\DC Power Connectors Power Jack/Connector 2.1mm x 5.5mm", Package=None, Availability=Unavailable, MP=CON-SOCJ-2155, Price=None
R1 R2 R3 R4 R5 R6 R12 R13 R14 R15 R16 R18 R19 R20 R21 R22 R23 R30 R31 R32 R33 R34 R35 R37 R38 R39 R40 R41 R42 R43 R44: library part "Resistor 1206"
R25 R26 R27: library part "Resistor 0805"
"RS 485 UART 0 (COMM)" "RS 485 UART 2 ( EPS )" "RS 485 UART 3 (ADCS)": library part MAX488ESA+, "1/1 Transceiver Full RS422, RS485 8-SOIC", Package="SOIC-8 Maxim", Availability=Unavailable, MF="Maxim Integrated", MP=MAX488ESA+T, Price=None, SnapEDA_Link=https://www.snapeda.com/parts/MAX488ESA+T/Maxim%20Integrated/view-part/48834/?ref=snap
"UART PH": "08 MODII HDR DRST B/A .100CL LF", Package=None, Availability=Unavailable, MF="TE Connectivity", MP=5-146256-4, Price=None, SnapEDA_Link=https://www.snapeda.com/parts/5-146256-4/TE%20Connectivity%20AMP%20Connectors/view-part/500529/?ref=snap
"Voltage Regulator 3.3V" "Voltage Regulator 5V": "TO-263-5/XL4015E1 5A 75W Adjustable DC/DC STEP DOWN CONVERTER Regulator IC SMD"
Y1: library part "Crystal 16MHZ"

## Free pads (board coordinates)
  round 177.17 hole 125.98 unplated: 1(0,0) 2(0,3149.61) 3(3374.01,3051.18) 4(3374.01,149.61)

## Nets (pads, with @x,y where several pads share a name; then routed paths per layer and width w, separated by ;. In a path a pad name is that pad's centre, name@x,y a point inside that pad or via, vN(x,y) a via of type N, cw(c..) or ccw(c..) an arc to the next point about the centre after c; other vN are vias at no path point)
3.3V: EUTS.20 POWER.4
5V: EUTS.10 POWER.5
9V: EUTS.14 POWER.6
AREF: ATMEGA.98 C4.2
CS: ATMEGA.6 R22.2
G: 74LVC125APW.1 74LVC125APW.4 74LVC125APW.7 74LVC125APW.10 74LVC125APW.13 "5V P LED.2" "9V P LED.2" "Micro SDCard Slot.6" "Power IN1.1" "Power IN1.3" "RS 485 UART 0 (COMM).4" "RS 485 UART 2 ( EPS ).4" "RS 485 UART 3 (ADCS).4" "SD P LED.2" "Voltage Regulator 3.3V.1" "Voltage Regulator 5V.1" "Voltage-Current Sensor.1" "Voltage-Current Sensor.4" ATMEGA.11 ATMEGA.32 ATMEGA.62 ATMEGA.81 ATMEGA.99 C1.1 C2.1 C3.1 C4.1 C5.2 C9.N C13.2 C14.2 C41.2 C42.N C50.2 C51.N C53.N C54.2 C55.2 C63.1 C64.1 C65.1 C66.1 D2.1 D4.1 EUTS.11 EUTS.12 EUTS.16 EUTS.29 EUTS.30 EUTS.31 EUTS.32 EUTS.45 EUTS.46 EUTS.50 EUTS.52 LED1.2 LED2.2 LED3.2 LM35.3 R14.1 R16.1 R27.1
MISO: 74LVC125APW.11 ATMEGA.22 BURN.1
MOSI: ATMEGA.21 BURN.2 R20.1
"Net5V P LED_1": "5V P LED.1" R34.2
"Net9V P LED_1": "9V P LED.1" R33.2
Net74LVC125APW_2: 74LVC125APW.2 R20.2
Net74LVC125APW_3: 74LVC125APW.3 "Micro SDCard Slot.3"
Net74LVC125APW_5: 74LVC125APW.5 R21.2
Net74LVC125APW_6: 74LVC125APW.6 "Micro SDCard Slot.5"
Net74LVC125APW_8: 74LVC125APW.8 "Micro SDCard Slot.2"
Net74LVC125APW_9: 74LVC125APW.9 R22.1
Net74LVC125APW_12: 74LVC125APW.12 R23.1
NetC1_2: C1.2 RESET.3
NetC40_2: "Voltage Regulator 3.3V.4" C40.2
NetC50_1: C50.1 C51.P D5.1 I2.2 R19.2
NetC53_P: C53.P C54.1 D3.1 I1.2 R15.2
NetC56_2: "Voltage Regulator 5V.4" C56.2
NetD1_1: "Power IN1.2" D1.1
NetD2_2: "Voltage Regulator 5V.3" D2.2 I1.1
NetD4_2: "Voltage Regulator 3.3V.3" D4.2 I2.1
NetLED1_1: LED1.1 R37.2
NetLED2_1: LED2.1 R38.2
NetLED3_1: LED3.1 R39.2
"NetMicro SDCard Slot_7": "Micro SDCard Slot.7" R23.2
NetR1_2: R1.2 RESET.1
NetR2_1: R2.1 R3.2
NetR14_2: R14.2 R18.1
NetR15_1: "Voltage Regulator 5V.2" R15.1 R16.2
NetR18_2: "Voltage Regulator 3.3V.2" R18.2 R19.1
NetR25_1: "Voltage-Current Sensor.5" R25.1
NetR26_1: R26.1 R27.2
NetR26_2: "Voltage-Current Sensor.8" R26.2
NetR30_2: "TX LED3.1" R30.2
NetR31_2: "RX LED3.1" R31.2
NetR32_2: "TX LED2.1" R32.2
NetR35_2: "SD P LED.1" R35.2
NetR40_2: "RX LED2.1" R40.2
NetR41_2: "TX LED1.1" R41.2
NetR42_2: "RX LED1.1" R42.2
NetR43_2: "TX LED0.1" R43.2
NetR44_2: "RX LED0.1" R44.2
"NetVoltage-Current Sensor_2": "Voltage-Current Sensor.2" "Voltage-Current Sensor.3"
PE3: ATMEGA.5 R39.1
PE5: ATMEGA.7 R37.1
PF0: "ADC PH.1" ATMEGA.97 LM35.2
PF1: "ADC PH.2" ATMEGA.96
PF2: "ADC PH.3" ATMEGA.95
PG5: ATMEGA.1 R38.1
"RD + (OBC-ADCS)": "RS 485 UART 3 (ADCS).8" EUTS.21 R12.2
"RD + (OBC-COMM)": "RS 485 UART 0 (COMM).8" EUTS.41 R13.2
"RD + (OBC-EPS)": "RS 485 UART 2 ( EPS ).8" EUTS.01 R5.2
"RD - (OBC-ADCS)": "RS 485 UART 3 (ADCS).7" EUTS.19 R12.1
"RD - (OBC-COMM)": "RS 485 UART 0 (COMM).7" EUTS.39 R13.1
"RD - (OBC-EPS)": "RS 485 UART 2 ( EPS ).7" EUTS.02 R5.1
RESET: ATMEGA.30 BURN.4 RESET.2
RXD0: "RS 485 UART 0 (COMM).2" "RX LED0.2" "UART PH.2" ATMEGA.2
RXD1: "RX LED1.2" "UART PH.4" ATMEGA.45 EUTS.38
RXD2: "RS 485 UART 2 ( EPS ).2" "RX LED2.2" "UART PH.6" ATMEGA.12
RXD3: "RS 485 UART 3 (ADCS).2" "RX LED3.2" "UART PH.8" ATMEGA.63
SCK: ATMEGA.20 BURN.3 R21.1
SCL: ATMEGA.43 R4.2
SDA: ATMEGA.44 R6.2
"Solar Array Input": EUTS.24
"TD + (OBC-ADCS)": "RS 485 UART 3 (ADCS).5" EUTS.17
"TD + (OBC-COMM)": "RS 485 UART 0 (COMM).5" EUTS.37
"TD + (OBC-EPS)": "RS 485 UART 2 ( EPS ).5" EUTS.03
"TD - (OBC-ADCS)": "RS 485 UART 3 (ADCS).6" EUTS.15
"TD - (OBC-COMM)": "RS 485 UART 0 (COMM).6" EUTS.35
"TD - (OBC-EPS)": "RS 485 UART 2 ( EPS ).6" EUTS.04
TXD0: "RS 485 UART 0 (COMM).3" "TX LED0.2" "UART PH.1" ATMEGA.3
TXD1: "TX LED1.2" "UART PH.3" ATMEGA.46 EUTS.36
TXD2: "RS 485 UART 2 ( EPS ).3" "TX LED2.2" "UART PH.5" ATMEGA.13
TXD3: "RS 485 UART 3 (ADCS).3" "TX LED3.2" "UART PH.7" ATMEGA.64
VBAT: EUTS.49 EUTS.51
VCC-3.3V(OBC): 74LVC125APW.14 "Micro SDCard Slot.4" D5.2 EUTS.05 POWER.3 R35.1
VCC-5V(ADCS): EUTS.28
VCC-5V(CAMERA): EUTS.06
VCC-5V(COMM): EUTS.18
VCC-5V(EPS): EUTS.08
VCC-5V(OBC): "RS 485 UART 0 (COMM).1" "RS 485 UART 2 ( EPS ).1" "RS 485 UART 3 (ADCS).1" "Voltage Regulator 3.3V.5" ATMEGA.10 ATMEGA.31 ATMEGA.61 ATMEGA.80 ATMEGA.100 C5.1 C13.1 C14.1 C40.1 C41.1 C42.P C63.2 C64.2 C65.2 C66.2 D3.2 EUTS.22 LM35.1 POWER.2 R1.1 R4.1 R6.1 R25.2 R30.1 R31.1 R32.1 R34.1 R40.1 R41.1 R42.1 R43.1 R44.1
VCC-9V(OBC): "Voltage Regulator 5V.5" C9.P C55.1 C56.1 D1.2 EUTS.07 POWER.1 R33.1
XTAL1: ATMEGA.34 C3.2 R3.1 Y1.2
XTAL2: ATMEGA.33 C2.2 R2.2 Y1.1
pads on no net: "Micro SDCard Slot.1" "Micro SDCard Slot.8" "Micro SDCard Slot.9" "Micro SDCard Slot.GND" "Voltage Regulator 3.3V.6" "Voltage Regulator 5V.6" "Voltage-Current Sensor.6" "Voltage-Current Sensor.7" "Voltage-Current Sensor.9" ATMEGA.4 ATMEGA.8 ATMEGA.9 ATMEGA.14 ATMEGA.15 ATMEGA.16 ATMEGA.17 ATMEGA.18 ATMEGA.19 ATMEGA.23 ATMEGA.24 ATMEGA.25 ATMEGA.26 ATMEGA.27 ATMEGA.28 ATMEGA.29 ATMEGA.35 ATMEGA.36 ATMEGA.37 ATMEGA.38 ATMEGA.39 ATMEGA.40 ATMEGA.41 ATMEGA.42 ATMEGA.47 ATMEGA.48 ATMEGA.49 ATMEGA.50 ATMEGA.51 ATMEGA.52 ATMEGA.53 ATMEGA.54 ATMEGA.55 ATMEGA.56 ATMEGA.57 ATMEGA.58 ATMEGA.59 ATMEGA.60 ATMEGA.65 ATMEGA.66 ATMEGA.67 ATMEGA.68 ATMEGA.69 ATMEGA.70 ATMEGA.71 ATMEGA.72 ATMEGA.73 ATMEGA.74 ATMEGA.75 ATMEGA.76 ATMEGA.77 ATMEGA.78 ATMEGA.79 ATMEGA.82 ATMEGA.83 ATMEGA.84 ATMEGA.85 ATMEGA.86 ATMEGA.87 ATMEGA.88 ATMEGA.89 ATMEGA.90 ATMEGA.91 ATMEGA.92 ATMEGA.93 ATMEGA.94 EUTS.09 EUTS.13 EUTS.23 EUTS.25 EUTS.26 EUTS.27 EUTS.33 EUTS.34 EUTS.40 EUTS.42 EUTS.43 EUTS.44 EUTS.47 EUTS.48

## Polygon pours and split planes (outlines as drawn)
G on Ground (split plane): 175 vertices, not listed, extent -173.26,-178.78 3544.52,3336.26
VCC-5V(OBC) on Power (split plane): 175 vertices, not listed, extent -173.26,-178.78 3544.52,3336.26

## Silkscreen, mask and mechanical layers (free items; w line width, h text height)
Mechanical 1:
  lines w10: -193.31,-120.08 ccw(c-153.94,-120.08) -153.94,-159.45 114.17,-159.45 cw(c114.17,-223.13) 159.2,-178.1 161.27,-180.17 ccw(c206.3,-135.14) 206.3,-198.82 2272.83,-198.82 ccw(c2272.83,-150.82) 2306.78,-184.76 2368.42,-123.11 cw(c2402.36,-157.05) 2402.36,-109.06 3525.2,-109.05 ccw(c3525.2,-69.68) 3564.57,-69.68 3564.57,285.43 ccw(c3513.72,285.43) 3549.67,321.39 3528.54,342.52 3502.04,369.03 cw(c3532.62,399.61) 3489.37,399.61 3489.37,2671.26 cw(c3582.52,2671.26) 3516.65,2737.12 3535.32,2755.79 ccw(c3469.45,2821.65) 3562.6,2821.65 3562.6,3131.5 ccw(c3523.23,3131.5) 3523.23,3170.87 3218.5,3170.87 cw(c3218.5,3276.37) 3143.9,3201.77 3020.27,3325.4 ccw(c2945.67,3250.8) 2945.67,3356.3 292.91,3356.3 287.48,3356.3 ccw(c287.48,3289.09) 239.96,3336.61 cw(c192.44,3384.14) 192.44,3316.93 187.01,3316.93 -153.94,3316.93 ccw(c-153.94,3277.56) -193.31,3277.56 -193.31,-120.08